# EAGLE board team16 (EAGLE 8.6.0)
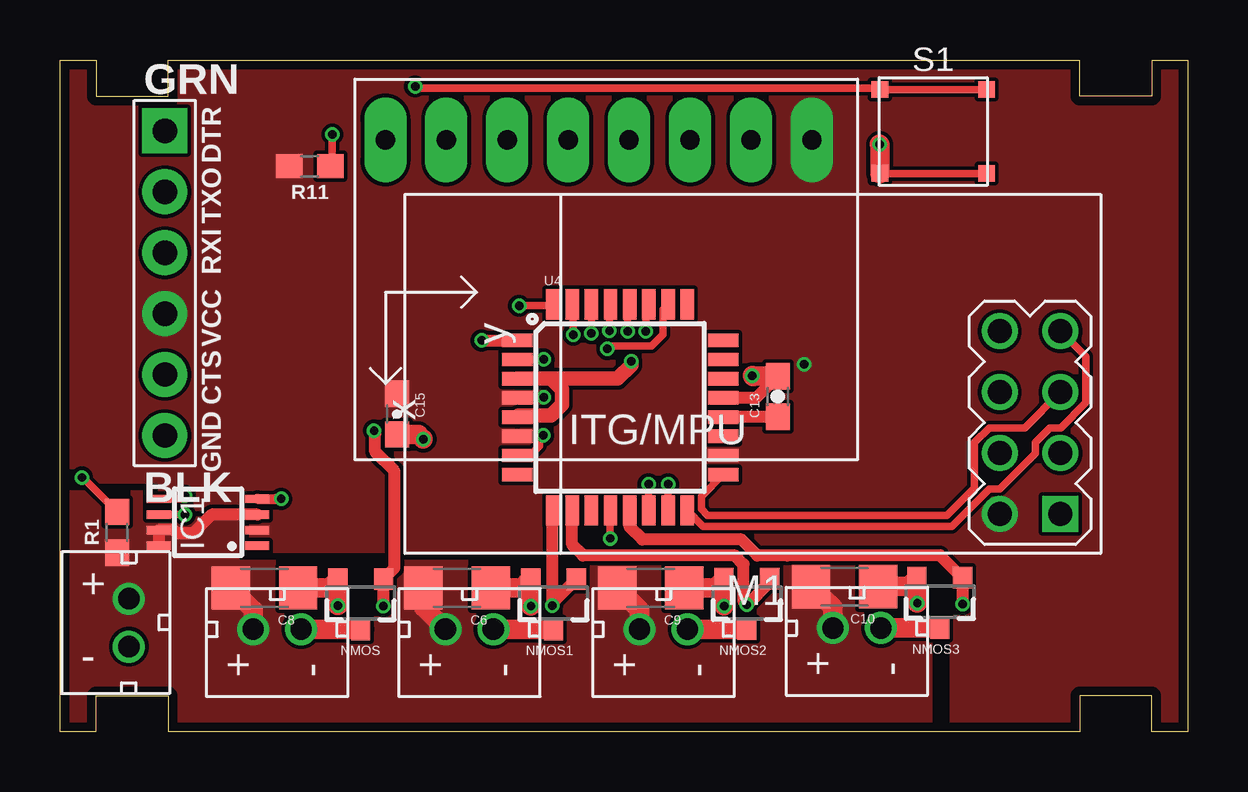
[diagram p0: board, top side]
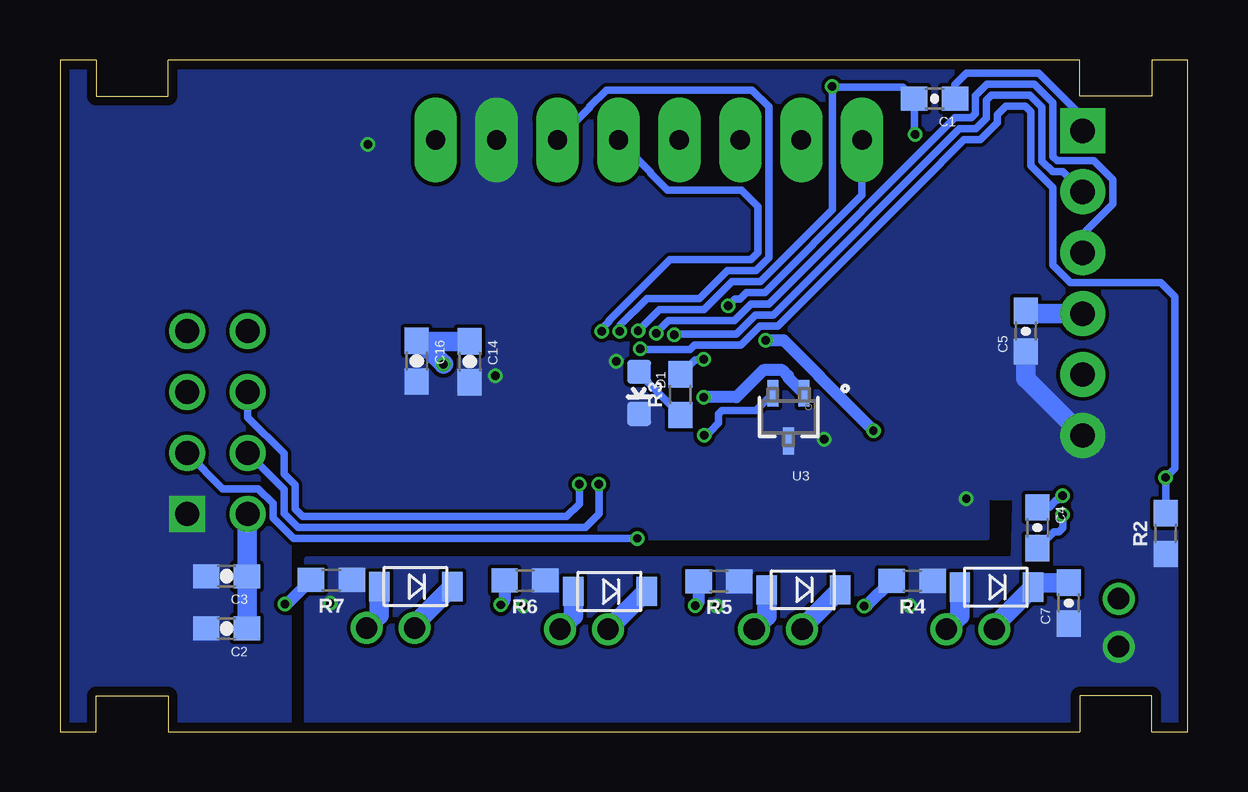
[diagram p1: board, bottom side, seen from below]

Size 47 x 28 mm. Coordinates in mm from the lower left corner, seen from the top.
Outline: 0,0 0,28 1.5,28 1.5,26.5 4.5,26.5 4.5,28 42.5,28 42.5,26.5 45.5,26.5 45.5,28 47,28 47,0 45.5,0 45.5,1.5 42.5,1.5 42.5,0 4.5,0 4.5,1.5 1.5,1.5 1.5,0 0,0
Copper layers (1*16): Top 0.035559375mm / dielectric 1.6mm / Bottom 0.035559375mm
Design rules "oshpark-2layer": minimum track width 6mil, minimum drill 10mil, track to track 6mil, track to pad 6mil, pad to pad 6mil, via to via 6mil, smd to smd 6mil, copper to edge 15mil, drill to drill 6mil, minimum pad ring 5mil, minimum via ring 5mil, stop-mask expansion 2.5mil, vias tented up to drill 0mil, thermal gap 10mil

## Footprints (pad centres in the part's own frame; a part is rotated, then mirrored left to right if it is on the bottom)
0603-CAP = smd 1.1 x 1: 1 -0.85,0; 2 0.85,0
1206 = smd 1.6 x 1.8: 1 -1.4,0; 2 1.4,0
LED-0603 = smd 1 x 1: A 0,-0.877; C 0,0.877
MINI2-F3-B = smd 1.22 x 0.85: NEG 0,1.55; POS 0,-1.5
MSOP8 = smd 0.35 x 1: 1 -0.975,-2.05; 2 -0.325,-2.05; 3 0.325,-2.05; 4 0.975,-2.05; 5 0.975,2.05; 6 0.325,2.05; 7 -0.325,2.05; 8 -0.975,2.05
FTDI_DEVICE_SIDE = drill 1.016 pad 1.88 square: P$1 -6.35,0 | drill 1.016 pad 1.88: P$2 -3.81,0; P$3 -1.27,0; P$4 1.27,0; P$5 3.81,0; P$6 6.35,0
WIRELESS-NRF24L01 = drill 1 square: 1 -12.7,6.35 | drill 1: 2 -10.16,6.35; 3 -12.7,3.81; 4 -10.16,3.81; 5 -12.7,1.27; 6 -10.16,1.27; 7 -12.7,-1.27; 8 -10.16,-1.27
JST_CONNECTOR_FEMALE = drill 0.889: + 0,1; - 0,-1
SOT23-3 = smd 0.8 x 0.9: 1 -0.95,-1; 2 0.95,-1; 3 0,1.1
0603 = smd 1.1 x 1: 1 -0.85,0; 2 0.85,0
TL3315NF100Q = smd 0.7 x 0.7: 1 -2.225,1.75; 2 2.225,1.75; 3 -2.225,-1.75; 4 2.225,-1.75
GY-521 = drill 0.8 pad 1.778 long: ADO -8.89,-6.35; GND -8.89,6.35; INT -8.89,-8.89; SCL -8.89,3.81; SDA -8.89,1.27; VCC -8.89,8.89; XCL -8.89,-3.81; XDA -8.89,-1.27
21-0075D = smd 0.457 x 1.118: 1 -0.65,-0.991; 2 0.65,-0.991; 3 0,0.991
TQFP32-08 = smd 1.27 x 0.559: 1 -4.293,2.8; 2 -4.293,2; 3 -4.293,1.2; 4 -4.293,0.4; 5 -4.293,-0.4; 6 -4.293,-1.2; 7 -4.293,-2; 8 -4.293,-2.8; 17 4.293,-2.8; 18 4.293,-2; 19 4.293,-1.2; 20 4.293,-0.4; 21 4.293,0.4; 22 4.293,1.2; 23 4.293,2; 24 4.293,2.8 | smd 0.559 x 1.27: 9 -2.8,-4.293; 10 -2,-4.293; 11 -1.2,-4.293; 12 -0.4,-4.293; 13 0.4,-4.293; 14 1.2,-4.293; 15 2,-4.293; 16 2.8,-4.293; 25 2.8,4.293; 26 2,4.293; 27 1.2,4.293; 28 0.4,4.293; 29 -0.4,4.293; 30 -1.2,4.293; 31 -2,4.293; 32 -2.8,4.293

## Placement (x,y rotation side)
C1  100nF  [0603-CAP]  10.54,26.39 180 bottom
C2  10uF  [0603-CAP]  40.06,4.29 180 bottom
C3  100nF  [0603-CAP]  40.06,6.48 180 bottom
C4  1uF  [0603-CAP]  6.26,8.49 270 bottom
C5  10uF  [0603-CAP]  6.73,16.69 90 bottom
C6  100uF  [1206]  16.55,5.99 180 top
C7  10uF  [0603-CAP]  4.95,5.36 90 bottom
C8  100uF  [1206]  8.53,5.99 180 top
C9  100uF  [1206]  24.62,5.99 180 top
C10  100uF  [1206]  32.7,6.04 180 top
C13  100nF  [0603-CAP]  29.92,13.97 90 top
C14  100nF  [0603-CAP]  29.92,15.42 270 bottom
C15  100nF  [0603-CAP]  14.05,13.23 270 top
C16  100nF  [0603-CAP]  32.13,15.44 270 bottom
D1  BLUE  [LED-0603]  22.86,14.12 180 bottom
DIODE  DB2W40300L  [MINI2-F3-B]  7.99,6.02 270 bottom
DIODE1  DB2W40300L  [MINI2-F3-B]  16.04,5.91 270 bottom
DIODE2  DB2W40300L  [MINI2-F3-B]  24.1,5.84 270 bottom
DIODE3  DB2W40300L  [MINI2-F3-B]  32.19,6.05 270 bottom
IC1  MCP1253-ADJ  [MSOP8]  6.17,8.72 90 top
J1  FTDI_DEVICE  [FTDI_DEVICE_SIDE]  4.37,18.69 270 top
M1  WIRELESS-NRF24L01  [WIRELESS-NRF24L01]  29.01,15.42 180 top
MOTOR1  JST_CONNECTOR_FEMALE  [JST_CONNECTOR_FEMALE]  9.05,4.26 90 top
MOTOR2  JST_CONNECTOR_FEMALE  [JST_CONNECTOR_FEMALE]  17.07,4.26 90 top
MOTOR3  JST_CONNECTOR_FEMALE  [JST_CONNECTOR_FEMALE]  25.15,4.26 90 top
MOTOR4  JST_CONNECTOR_FEMALE  [JST_CONNECTOR_FEMALE]  33.22,4.32 90 top
NMOS  N-CHANNEL-MOSFET-IRLML6244TRPBF  [SOT23-3]  12.53,5.36 180 top
NMOS1  N-CHANNEL-MOSFET-IRLML6244TRPBF  [SOT23-3]  20.57,5.36 180 top
NMOS2  N-CHANNEL-MOSFET-IRLML6244TRPBF  [SOT23-3]  28.63,5.37 180 top
NMOS3  N-CHANNEL-MOSFET-IRLML6244TRPBF  [SOT23-3]  36.67,5.41 180 top
R1  2.2k  [0603]  2.39,8.31 90 top
R2  2.2k  [0603]  0.91,8.26 90 bottom
R3  2.2k  [0603]  21.13,14.05 90 bottom
R4  10k  [0603]  11.48,6.29 180 bottom
R5  10k  [0603]  19.53,6.27 180 bottom
R6  10k  [0603]  27.62,6.29 180 bottom
R7  10k  [0603]  35.69,6.32 180 bottom
R11  10k  [0603]  10.41,23.57 180 top
S1  TL3315NF100Q  [TL3315NF100Q]  36.4,25.02 0 top
U2  GY-521MPU6050  [GY-521]  22.45,15.77 270 top
U3  MAX7375AXR805-T  [21-0075D]  16.63,13.11 180 bottom
U4  ATMEGA328P_TQFP  [TQFP32-08]  23.35,13.51 0 top
U$1  JST_CONNECTOR_FEMALE  [JST_CONNECTOR_FEMALE]  2.87,4.54 0 top

## Library data of the parts
C1 C4 C5 C7 C15 = SparkFun-Capacitors; PROD_ID: CAP-00810
C2 C3 C6 C8-C10 C13 C14 C16 = SparkFun-Passives
D1 = LEDs; PROD_ID: DIO-08575; SPICEPREFIX: D
DIODE DIODE1-DIODE3 J1 M1 MOTOR1-MOTOR4 U2 U$1 = quad
IC1 = microchip
NMOS NMOS1-NMOS3 = quad; DATASHEET: http://www.mouser.com/ds/2/196/irlml6244pbf-936666.pdf; MOUSER: 942-IRLML6244TRPBF; URL: http://www.mouser.com/Search/ProductDetail.aspx?R=IRLML6244TRPBFvirtualkey57370000virtualkey942-IRLML6244TRPBF
R1 R2 R4-R7 R11 = SparkFun-Resistors; PROD_ID: RES-08272
R3 = SparkFun-Resistors; PROD_ID: RES-08272; SPICEPREFIX: R
S1 = TL3315NF100Q; DESCRIPTION: SWITCH TACTILE SPST-NO 0.05A 15V; DIGI-KEY_PART_NUMBER: EG4620CT-ND; DIGI-KEY_PURCHASE_URL: https://www.digikey.com/product-detail/en/e-switch/TL3315NF100Q/EG4620CT-ND/1870400?WT.z_cid=ref_snapeda&utm_source=snapeda&utm_medium=aggregator&utm_campaign=buynow; MF: E-Switch; MP: TL3315NF100Q; PACKAGE: None
U3 = MAX7375AXR805-T; AVAILABILITY: Good; DESCRIPTION: OSCILLATOR MEMS 8MHZ CMOS SMD; MF: Maxim Integrated; MP: MAX7375AXR805+T; PACKAGE: SC-70 Maxim Integrated; PRICE: 1.06 USD
U4 = quad; PROD_ID: IC-09069

## Nets
BATTERY+: C6.2 C7.2 C8.2 C9.2 C10.2 DIODE1.NEG DIODE2.NEG DIODE3.NEG DIODE.NEG IC1.3 IC1.7 IC1.8 MOTOR1.+ MOTOR2.+ MOTOR3.+ MOTOR4.+ R1.1 U$1.+
FTDI-RX: J1.P$3 U4.30
FTDI-TX: J1.P$2 U4.31
GND: C2.2 C3.2 C5.1 C6.1 C7.1 C8.1 C9.1 C10.1 C13.2 C14.2 C15.2 C16.2 D1.C IC1.4 J1.P$6 M1.1 NMOS1.2 NMOS2.2 NMOS3.2 NMOS.2 R2.1 R4.1 R5.1 R6.1 R7.1 S1.3 S1.4 U2.GND U3.3 U4.3 U4.5 U4.21 U$1.-
IMU-INT: U2.INT U4.32
IMU-SCL: U2.SCL U4.28
IMU-SDA: U2.SDA U4.27
MEASURE_PIN: R1.2 R2.2 U4.26
MOTOR1: NMOS.1 R4.2 U4.1
MOTOR2: NMOS1.1 R5.2 U4.9
MOTOR3: NMOS2.1 R6.2 U4.10
MOTOR4: NMOS3.1 R7.2 U4.13
N$1: R3.2 U4.2
N$2: C1.1 J1.P$1
N$4: DIODE1.POS MOTOR2.- NMOS1.3
N$5: DIODE2.POS MOTOR3.- NMOS2.3
N$6: DIODE.POS MOTOR1.- NMOS.3
N$7: DIODE3.POS MOTOR4.- NMOS3.3
N$8: C4.1 IC1.5
N$9: C4.2 IC1.6
N$11: D1.A R3.1
N$15: C13.1 U4.20
OSC1: U3.2 U4.7
RESET: C1.2 R11.1 S1.1 S1.2 U4.29
RF-CE: M1.3 U4.12
RF-CSN: M1.4 U4.14
RF-MISO: M1.7 U4.16
RF-MOSI: M1.6 U4.15
RF-SCK: M1.5 U4.17
VCC: C2.1 C3.1 C5.2 C14.1 C15.1 C16.1 IC1.2 J1.P$4 M1.2 R11.2 U2.VCC U3.1 U4.4 U4.6 U4.18

## Tracks (layer width: path | path; a pad name or v marks a point on that pad's centre or on a via)
BATTERY+
  Top 0.508: IC1.3 6.32,9.05 5.53,8.26 4.88,8.26 4.74,8.4 IC1.7 IC1.8
  Top 0.813: 32.19,4.34 MOTOR4.+ 32.22,5.18 C10.2 | 24.15,4.04 MOTOR3.+ 24.15,5.06 C9.2 | C6.2 15.15,5.18 MOTOR2.+ | C8.2 8.05,5.07 MOTOR1.+
  Bottom 0.813: DIODE3.NEG 32.22,4.47 MOTOR4.+ | DIODE2.NEG 22.58,5.84 MOTOR3.+ | DIODE1.NEG 16.07,4.33 MOTOR2.+ | MOTOR1.+ 8.05,4.41 DIODE.NEG 6.25,6.21 C7.2
  pour Top (no thermals): -0.28,9.91 3.51,9.91 3.51,8.81 7.32,8.81 7.32,7.01 36.22,7.01 36.22,-0.2 -0.28,-0.2
FTDI-RX  (via drill 0.35)
  Top 0.305: v22.15,16.61 U4.30
  Bottom 0.305: J1.P$3 4.37,20.74 3.12,21.99 3.12,23.02 3.9,23.8 5.43,23.8 5.61,23.98 5.61,26.21 6.39,26.99 8.36,26.99 8.84,26.51 8.84,25.76 9.02,25.59 9.69,25.59 17.45,17.83 18.21,17.83 18.89,17.14 21.64,17.14 22,16.79 22,16.76 v22.15,16.61
FTDI-TX  (via drill 0.35)
  Top 0.305: v21.39,16.54 21.39,17.76 U4.31
  Bottom 0.305: J1.P$2 5.21,23.34 5.62,23.34 6.07,23.79 6.07,26.02 6.58,26.53 8.17,26.53 8.38,26.32 8.38,25.57 8.82,25.13 9.51,25.13 17.26,17.37 18.02,17.37 18.81,16.58 21.35,16.58 v21.39,16.54
GND  (via drill 0.35)
  Top 0.305: S1.3 S1.4 | 19.28,13.11 | U4.5
  Top 0.406: IC1.4 9.01,9.7 9.07,9.7 v9.22,9.7
  Top 0.508: U4.5 19.28,13.11 | C13.2 29.01,13.91 U4.21
  Top 0.61: U4.3 20.57,14.71 | 20.57,14.71 23.25,14.71 23.81,15.28 v23.81,15.44 | U4.5 19.12,13.17 20.47,13.17 20.93,13.63 20.93,14.26 20.57,14.61 20.57,14.71
  Top 0.813: S1.3 34.17,24.48 v34.16,24.49 | C10.1 35.35,6.04 NMOS3.2 35.72,5.37 v35.74,5.36 | C9.1 27.31,5.99 NMOS2.2 v27.68,5.24 v27.69,5.23 | C6.1 19.25,5.99 NMOS1.2 19.62,5.25 v19.63,5.23 | C8.1 11.22,5.99 NMOS.2 v11.59,5.26 v11.58,5.26 | C15.2 14.95,12.38 v15.14,12.19 | C13.2 28.94,14.82 28.93,14.81 28.88,14.81 v28.85,14.83
  Bottom 0.813: C5.1 6.73,14.71 J1.P$6
  pour Bottom (no thermals): -0.86,28.63 47.83,28.63 47.83,-0.74 37.49,-0.74 37.49,8.13 8.36,8.13 8.41,8.15 8.41,11.3 8.18,9.8 -0.79,9.8
  pour Bottom (no thermals): -0.64,4.7 -0.71,10.29 7.14,10.31 7.21,7.16 36.68,7.16 36.68,-0.61 -0.66,-0.61
IMU-INT  (via drill 0.35)
  Top 0.305: v19.14,17.75 20.5,17.75 U4.32
  Bottom 0.305: U2.INT 13.56,22.36 17.62,18.31 18.38,18.31 18.66,18.02 18.87,18.02 v19.14,17.75
IMU-SCL  (via drill 0.35)
  Top 0.305: v23.66,16.69 23.66,17.72 U4.28
  Bottom 0.305: U2.SCL 24.92,26.01 24.92,26.05 24.22,26.75 18.15,26.75 17.45,26.05 17.45,19.77 18,19.22 19.18,19.22 20.34,18.06 22.54,18.06 23.66,16.94 v23.66,16.69
IMU-SDA  (via drill 0.35)
  Top 0.305: v24.42,16.69 24.42,17.68 U4.27
  Bottom 0.305: U2.SDA 22.38,23.32 22.38,23.28 21.68,22.58 18.59,22.58 17.91,21.89 17.91,19.96 18.19,19.68 21.57,19.68 24.12,17.13 24.12,17.09 24.42,16.79 v24.42,16.69
MEASURE_PIN  (via drill 0.35)
  Top 0.305: R1.2 0.91,10.63 | 0.91,10.63 0.91,10.64 | 0.91,10.63 v0.91,10.59 | U4.26 25.13,17.59 25.13,16.55 24.67,16.08 22.94,16.08 v22.81,15.95
  Bottom 0.305: v22.81,15.95 22.81,16.08 22.66,15.93 20.74,15.93 20.55,16.12 18.62,16.12 17.83,16.91 17.07,16.91 11.2,22.78 11.2,22.79 9.31,24.67 8.64,24.67 7.92,25.39 7.92,25.72 7.57,26.08 6.77,26.08 6.53,25.83 6.53,23.6 5.61,22.68 5.61,19.45 4.88,18.72 1.12,18.72 0.53,18.14 0.53,10.97 v0.91,10.59 R2.2
MOTOR1  (via drill 0.35)
  Top 0.508: v13.49,5.23 NMOS.1 13.95,6.82 13.95,10.86 13.14,11.66 13.14,12.42 13.09,12.47 v13.09,12.55 | v17.58,16.31 U4.1
  Bottom 0.508: R4.2 13.38,5.23 v13.49,5.23 | v13.09,12.55 15.35,14.8 15.35,14.83 16.83,16.31 v17.58,16.31
MOTOR2  (via drill 0.35)
  Top 0.508: NMOS1.1 20.52,5.36 v20.52,5.26 20.52,9.2 U4.9
  Bottom 0.508: R5.2 20.38,5.4 v20.52,5.26
MOTOR3  (via drill 0.35)
  Top 0.508: NMOS2.1 29.58,6.24 v28.63,5.28 28.5,5.41 28.5,6.98 28.14,7.34 21.79,7.34 21.35,7.79 U4.10
  Bottom 0.508: R6.2 28.47,5.44 v28.63,5.28
MOTOR4  (via drill 0.35)
  Top 0.508: v37.62,5.31 v37.62,5.32 NMOS3.1 36.69,7.35 30.33,7.35 30.32,7.34 29.07,7.34 28.41,8 24.27,8 23.75,8.53 U4.13
  Bottom 0.508: R7.2 37.55,5.31 v37.62,5.31
N$1  (via drill 0.35)
  Top 0.305: v20.17,15.51 U4.2
  Bottom 0.305: R3.2 20.54,15.49 20.45,15.49 20.43,15.51 v20.17,15.51
N$2
  Bottom 0.305: C1.1 9.69,26.98 9.22,27.45 6.2,27.45 4.37,25.61 J1.P$1
N$4
  Top 0.813: NMOS1.3 MOTOR2.-
  Bottom 0.813: MOTOR2.- 17.54,4.79 DIODE1.POS
N$5
  Top 0.813: NMOS2.3 MOTOR3.-
  Bottom 0.813: MOTOR3.- 25.6,4.82 DIODE2.POS
N$6
  Top 0.813: NMOS.3 MOTOR1.-
  Bottom 0.813: MOTOR1.- 9.49,4.83 DIODE.POS
N$7
  Top 0.813: NMOS3.3 MOTOR4.-
  Bottom 0.813: DIODE3.POS 33.69,4.84 MOTOR4.-
N$8  (via drill 0.35)
  Top 0.305: IC1.5 5.13,9.7 v5.21,9.83
  Bottom 0.305: v5.21,9.83 5.39,9.65 5.46,9.65 5.76,9.34 C4.1
N$9  (via drill 0.35)
  Top 0.305: v5.21,9.04 IC1.6
  Bottom 0.305: C4.2 5.57,8.33 5.36,8.33 5.21,8.48 v5.21,9.04
N$11
  Bottom 0.305: D1.A 22.84,14.92 22.84,14.9 R3.1
N$15
  Top 0.508: C13.1 U4.20
OSC1  (via drill 0.35)
  Top 0.305: v20.14,12.35 19.99,12.2 19.99,11.9 19.6,11.51 U4.7
  Bottom 0.305: U3.2 18,13.39 19.41,13.39 19.56,13.23 19.56,12.86 19.92,12.5 20.19,12.5 20.19,12.4 v20.14,12.35
RESET  (via drill 0.35)
  Top 0.305: R11.1 arc90 11.35,23.66 v11.35,24.89 | S1.2 S1.1 34.12,26.82 34.1,26.83 14.88,26.83 v14.81,26.9 | v22.91,16.71 22.91,17.76 U4.29
  Bottom 0.305: v11.35,24.89 arc90 11.39,24.93 C1.2 11.87,26.87 14.78,26.87 v14.81,26.9 14.81,21.77 17.81,18.76 18.99,18.76 20.15,17.6 22.02,17.6 22.83,16.79 22.86,16.79 22.91,16.84 v22.91,16.71
RF-CE  (via drill 0.35)
  Top 0.305: v22.94,8.05 22.94,9.21 U4.12
  Bottom 0.305: v22.94,8.05 37.26,8.05 38.11,8.9 38.11,9.51 38.73,10.12 40.22,10.12 M1.3
RF-CSN  (via drill 0.35)
  Top 0.305: v24.54,10.31 24.54,9.23 U4.14
  Bottom 0.305: v24.54,10.31 24.54,9.07 25.09,8.51 37.07,8.51 37.66,9.09 37.66,10.1 M1.4
RF-MISO
  Top 0.305: U4.16 26.81,8.56 37.17,8.56 38.73,10.12 39.17,10.12 40.65,11.6 40.65,12.04 41.27,12.66 41.71,12.66 42.76,13.71 42.76,15.63 M1.7
RF-MOSI  (via drill 0.35)
  Top 0.305: v25.35,10.31 U4.15
  Bottom 0.305: v25.35,10.31 25.35,9.5 25.88,8.97 36.88,8.97 37.2,9.28 37.2,10.29 37.66,10.74 37.66,11.59 39.17,13.1 M1.6
RF-SCK
  Top 0.305: U4.17 26.73,9.8 26.73,9.28 27,9.02 36.98,9.02 38.11,10.15 38.11,12.04 38.73,12.66 40.22,12.66 M1.5
VCC  (via drill 0.35)
  Top 0.305: v20.17,13.95 19.09,13.95 U4.4
  Bottom 0.508: U3.1 16.65,14.77 16.65,14.83 16.89,15.07 17.68,15.07 18.8,13.95 v20.17,13.95
  Bottom 0.813: C14.1 32.13,16.27 C16.1 31.99,16.29 v31.01,15.32 | M1.2 39.21,9.03 C3.1 C2.1 | C5.2 6.62,17.42 J1.P$4
  pour Top (no thermals): -0.28,28.22 -0.25,10.49 4.27,10.49 4.24,10.39 4.24,9.35 8.03,9.35 8.03,7.59 36.96,7.59 36.96,7.65 37.24,7.65 37.24,-0.25 47.29,-0.25 47.29,28.22